# EAGLE board untitled (EAGLE 6.1)
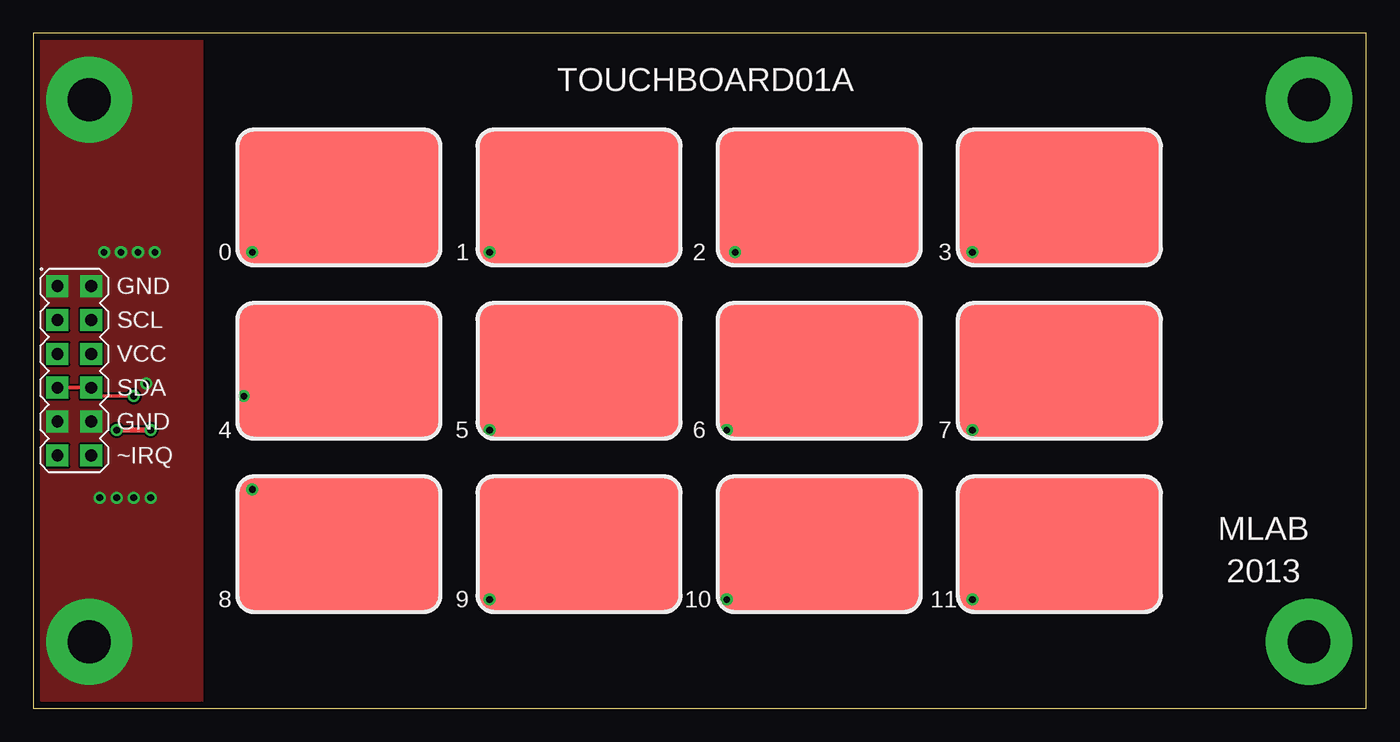
[diagram p0: board, top side]
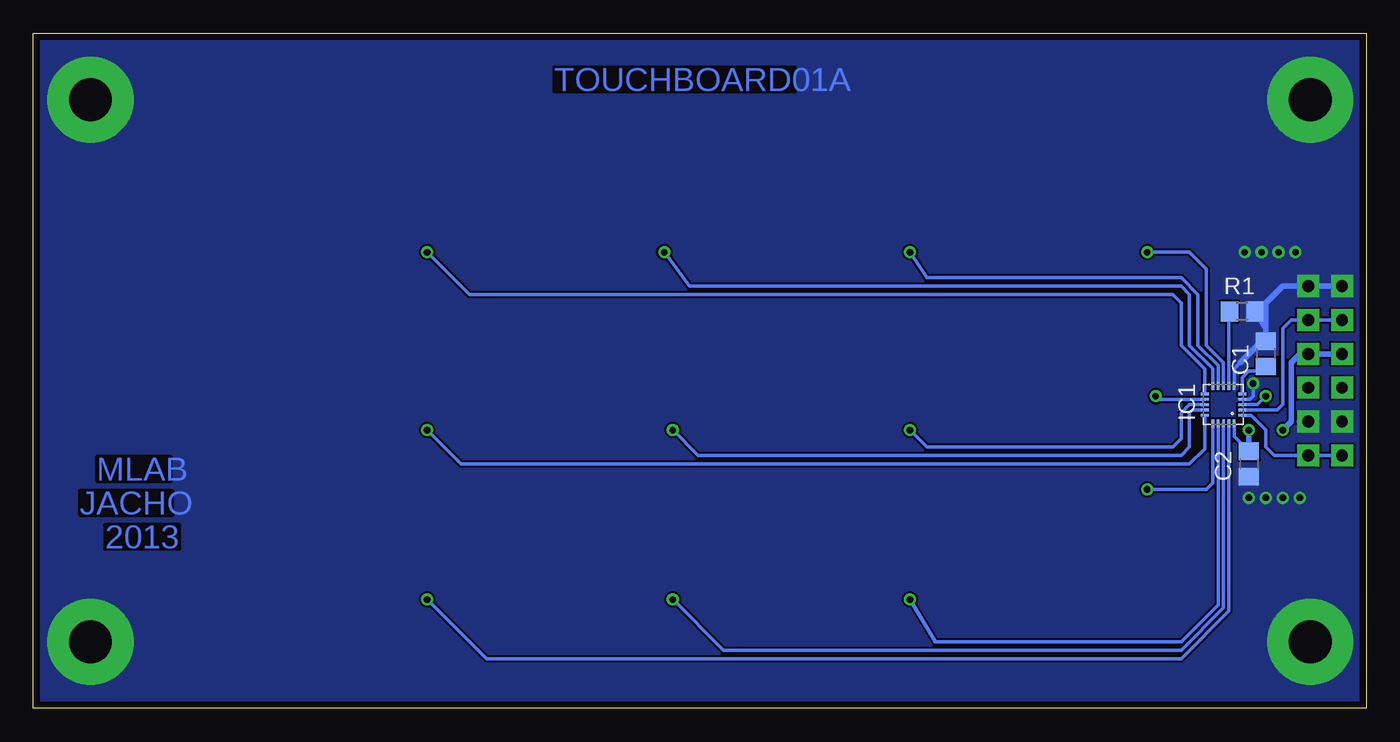
[diagram p1: board, bottom side, seen from below]

Size 99.9 x 50.6 mm. Coordinates in mm from the lower left corner, seen from the top.
Outline: 0,0 99.9,0 99.9,50.6 0,50.6 0,0
Copper layers (1*16): Top 0.035mm / dielectric 1.5mm / Bottom 0.035mm
Design rules: minimum track width 8mil, minimum drill 16mil, track to track 6mil, track to pad 6mil, pad to pad 6mil, via to via 6mil, smd to smd 6mil, copper to edge 20mil, drill to drill 8mil, minimum pad ring 10mil, minimum via ring 8mil, stop-mask expansion 4mil, vias tented up to drill 25mil, thermal gap 0mil

## Footprints (pad centres in the part's own frame; a part is rotated, then mirrored left to right if it is on the bottom)
C0805 = smd 1.3 x 1.5: 1 -0.95,0; 2 0.95,0
QFN-20-0.4MM = smd 0.6 x 0.2: 1 -1.4,0.8; 2 -1.4,0.4; 3 -1.4,0; 4 -1.4,-0.4; 5 -1.4,-0.8; 11 1.4,-0.8; 12 1.4,-0.4; 13 1.4,0; 14 1.4,0.4; 15 1.4,0.8 | smd 0.2 x 0.6: 6 -0.8,-1.4; 7 -0.4,-1.4; 8 0,-1.4; 9 0.4,-1.4; 10 0.8,-1.4; 16 0.8,1.4; 17 0.4,1.4; 18 0,1.4; 19 -0.4,1.4; 20 -0.8,1.4
0805 = smd 1.3 x 1.5: 1 -0.95,0; 2 0.95,0
MA06-2 = drill 0.889 pad 1.651 square: 1 -6.35,-1.27; 2 -6.35,1.27; 3 -3.81,-1.27; 4 -3.81,1.27; 5 -1.27,-1.27; 6 -1.27,1.27; 7 1.27,-1.27; 8 1.27,1.27; 9 3.81,-1.27; 10 3.81,1.27; 11 6.35,-1.27; 12 6.35,1.27
PLOSKA10_15 = smd 15 x 10: P$1 0,0
SROUB3M = drill 3.2 pad 6.452: P$1 0,0

## Placement (x,y rotation side)
C1  100nF  [C0805]  7.52,26.57 90 bottom
C2  100nF  [C0805]  8.79,18.31 270 bottom
IC1  MPR121  [QFN-20-0.4MM]  10.7,22.76 180 bottom
R1  75k 1%  [0805]  9.3,29.74 180 bottom
SV1  [MA06-2]  3.07,25.3 270 top
U$1  TL_DOTYK_10_15  [PLOSKA10_15]  22.9,38.3 0 top
U$2  TL_DOTYK_10_15  [PLOSKA10_15]  40.9,38.3 0 top
U$3  TL_DOTYK_10_15  [PLOSKA10_15]  58.9,38.3 0 top
U$4  TL_DOTYK_10_15  [PLOSKA10_15]  76.9,38.3 0 top
U$5  TL_DOTYK_10_15  [PLOSKA10_15]  22.9,25.3 0 top
U$6  TL_DOTYK_10_15  [PLOSKA10_15]  40.9,25.3 0 top
U$7  TL_DOTYK_10_15  [PLOSKA10_15]  58.9,25.3 0 top
U$8  TL_DOTYK_10_15  [PLOSKA10_15]  76.9,25.3 0 top
U$9  TL_DOTYK_10_15  [PLOSKA10_15]  22.9,12.3 0 top
U$10  TL_DOTYK_10_15  [PLOSKA10_15]  40.9,12.3 0 top
U$11  TL_DOTYK_10_15  [PLOSKA10_15]  58.9,12.3 0 top
U$12  TL_DOTYK_10_15  [PLOSKA10_15]  76.9,12.3 0 top
X1  SROUB3M  [SROUB3M]  4.18,4.98 0 top
X2  SROUB3M  [SROUB3M]  95.62,4.98 0 top
X3  SROUB3M  [SROUB3M]  4.18,45.62 0 top
X4  SROUB3M  [SROUB3M]  95.62,45.62 0 top

## Library data of the parts
C1 C2 = moje_C
IC1 = SparkFun
R1 = moje_R
SV1 = moje_hrebinky; OC_FARNELL: unknown; OC_NEWARK: unknown
U$1-U$12 = moje_tlacitka
X1-X4 = moje

## Nets
GND: C1.2 C2.2 IC1.4 IC1.6 R1.1 SV1.1 SV1.2 SV1.9 SV1.10 X1.P$1 X2.P$1 X3.P$1 X4.P$1
KEY0: IC1.8 U$1.P$1
KEY1: IC1.9 U$2.P$1
KEY2: IC1.10 U$3.P$1
KEY3: IC1.11 U$4.P$1
KEY4: IC1.12 U$5.P$1
KEY5: IC1.13 U$6.P$1
KEY6: IC1.14 U$7.P$1
KEY7: IC1.15 U$8.P$1
KEY8: IC1.16 U$9.P$1
KEY9: IC1.17 U$10.P$1
KEY10: IC1.18 U$11.P$1
KEY11: IC1.19 U$12.P$1
REXT: IC1.7 R1.2
SCL: IC1.2 SV1.3 SV1.4
SDA: IC1.3 SV1.7 SV1.8
VCC: C2.1 IC1.20 SV1.5 SV1.6
VREG: C1.1 IC1.5
~IRQ: IC1.1 SV1.11 SV1.12

## Tracks (layer width: path | path; a pad name or v marks a point on that pad's centre or on a via)
GND  (via drill 0.5)
  Bottom 0.254: IC1.6 9.89,25.46 9.43,25.93 | IC1.4 8.71,23.16 8.47,23.39 v8.47,24.35
  Bottom 0.406: 9.43,25.93 8.16,27.2 7.84,27.2 C1.2 7.52,28.47 | SV1.1 SV1.2 6.25,31.65 7.52,30.38 7.52,28.47 | R1.1 7.52,28.47
  other vias: 4.98,15.78 6.25,15.78 7.52,15.78 8.79,15.78 5.3,34.19 6.57,34.19 7.84,34.19 9.11,34.19
  pour Bottom: -0.1,50.7 -0.1,-0.1 99.59,-0.1 99.59,50.7
  pour Top: 0.54,50.7 -0.1,50.7 -0.1,-0.1 12.6,-0.1 12.6,50.06
KEY0  (via drill 0.5)
  Top 0.254: v16.41,34.19 18.95,34.19 22.76,38 22.76,38.16 U$1.P$1
  Bottom 0.254: v16.41,34.19 13.24,34.19 11.96,32.92 11.96,27.2 10.7,25.93 IC1.8
KEY1  (via drill 0.5)
  Top 0.254: v34.19,34.19 36.79,34.19 U$2.P$1
  Bottom 0.254: IC1.9 11.1,25.7 12.6,27.2 12.6,31.01 13.87,32.28 32.92,32.28 v34.19,34.19
KEY2  (via drill 0.5)
  Top 0.254: v52.6,34.19 54.79,34.19 U$3.P$1
  Bottom 0.254: IC1.10 11.5,25.46 13.24,27.2 13.24,31.01 13.87,31.65 50.7,31.65 v52.6,34.19
KEY3  (via drill 0.5)
  Top 0.254: v70.39,34.19 72.79,34.19 U$4.P$1
  Bottom 0.254: IC1.11 12.1,25.43 13.87,27.2 13.87,30.38 14.51,31.01 67.21,31.01 v70.39,34.19
KEY4  (via drill 0.5)
  Top 0.254: v15.78,23.39 22.76,23.39 22.76,25.3 U$5.P$1
  Bottom 0.254: IC1.12 15.78,23.16 v15.78,23.39
KEY5  (via drill 0.5)
  Top 0.254: v34.19,20.85 36.45,20.85 U$6.P$1
  Bottom 0.254: v34.19,20.85 32.92,19.58 14.51,19.58 13.87,20.22 13.87,22.12 13.24,22.76 IC1.13
KEY6  (via drill 0.5)
  Top 0.254: v51.97,20.85 54.45,20.85 U$7.P$1
  Bottom 0.254: v51.97,20.85 50.06,18.95 13.87,18.95 13.24,19.58 13.24,22.12 13,22.36 IC1.14
KEY7  (via drill 0.5)
  Top 0.254: v70.39,20.85 72.46,20.85 U$8.P$1
  Bottom 0.254: v70.39,20.85 67.84,18.31 13.24,18.31 12.1,19.45 IC1.15
KEY8  (via drill 0.5)
  Top 0.254: v16.41,16.41 19.58,16.41 22.76,13.24 22.76,12.44 U$9.P$1
  Bottom 0.254: IC1.16 11.5,16.88 11.96,16.41 v16.41,16.41
KEY9  (via drill 0.5)
  Top 0.254: v34.19,8.16 36.75,8.16 U$10.P$1
  Bottom 0.254: IC1.17 11.1,7.76 13.87,4.98 32.28,4.98 v34.19,8.16
KEY10  (via drill 0.5)
  Top 0.254: v51.97,8.16 54.75,8.16 U$11.P$1
  Bottom 0.254: IC1.18 10.7,7.52 13.87,4.35 48.16,4.35 v51.97,8.16
KEY11  (via drill 0.5)
  Top 0.254: v70.39,8.16 72.76,8.16 U$12.P$1
  Bottom 0.254: IC1.19 10.29,7.29 13.87,3.71 65.94,3.71 v70.39,8.16
REXT
  Bottom 0.254: IC1.7 10.29,28.39 R1.2
SCL
  Bottom 0.254: IC1.2 6.65,22.36 6.25,22.76 6.25,28.47 5.62,29.11 SV1.4 SV1.3
SDA  (via drill 0.5)
  Top 0.254: v7.52,23.39 4.98,23.39 SV1.8 SV1.7
  Bottom 0.254: IC1.3 8.16,22.76 v7.52,23.39
VCC  (via drill 0.5)
  Top 0.406: v6.25,20.85 v8.79,20.85
  Bottom 0.254: IC1.20 9.89,20.37 C2.1
  Bottom 0.406: SV1.5 SV1.6 4.98,26.57 5.62,25.93 5.62,21.49 v6.25,20.85 | v8.79,20.85 C2.1
VREG
  Bottom 0.254: IC1.5 9.29,24.79 8.79,25.3 7.83,25.3 C1.1
~IRQ
  Bottom 0.254: SV1.11 SV1.12 6.89,18.95 7.52,19.58 7.52,20.85 8.62,21.96 IC1.1

## Text on the board
Bottom: TOUCHBOARD01A | MLAB | JACHO | 2013
tPlace: TOUCHBOARD01A | 0 | 1 | 2 | 3 | GND | SCL | VCC | SDA | GND | 4 | 5 | 6 | 7 | ~IRQ | MLAB | 2013 | 8 | 9 | 10 | 11